# EAGLE board PANEL (EAGLE 7.2.0)
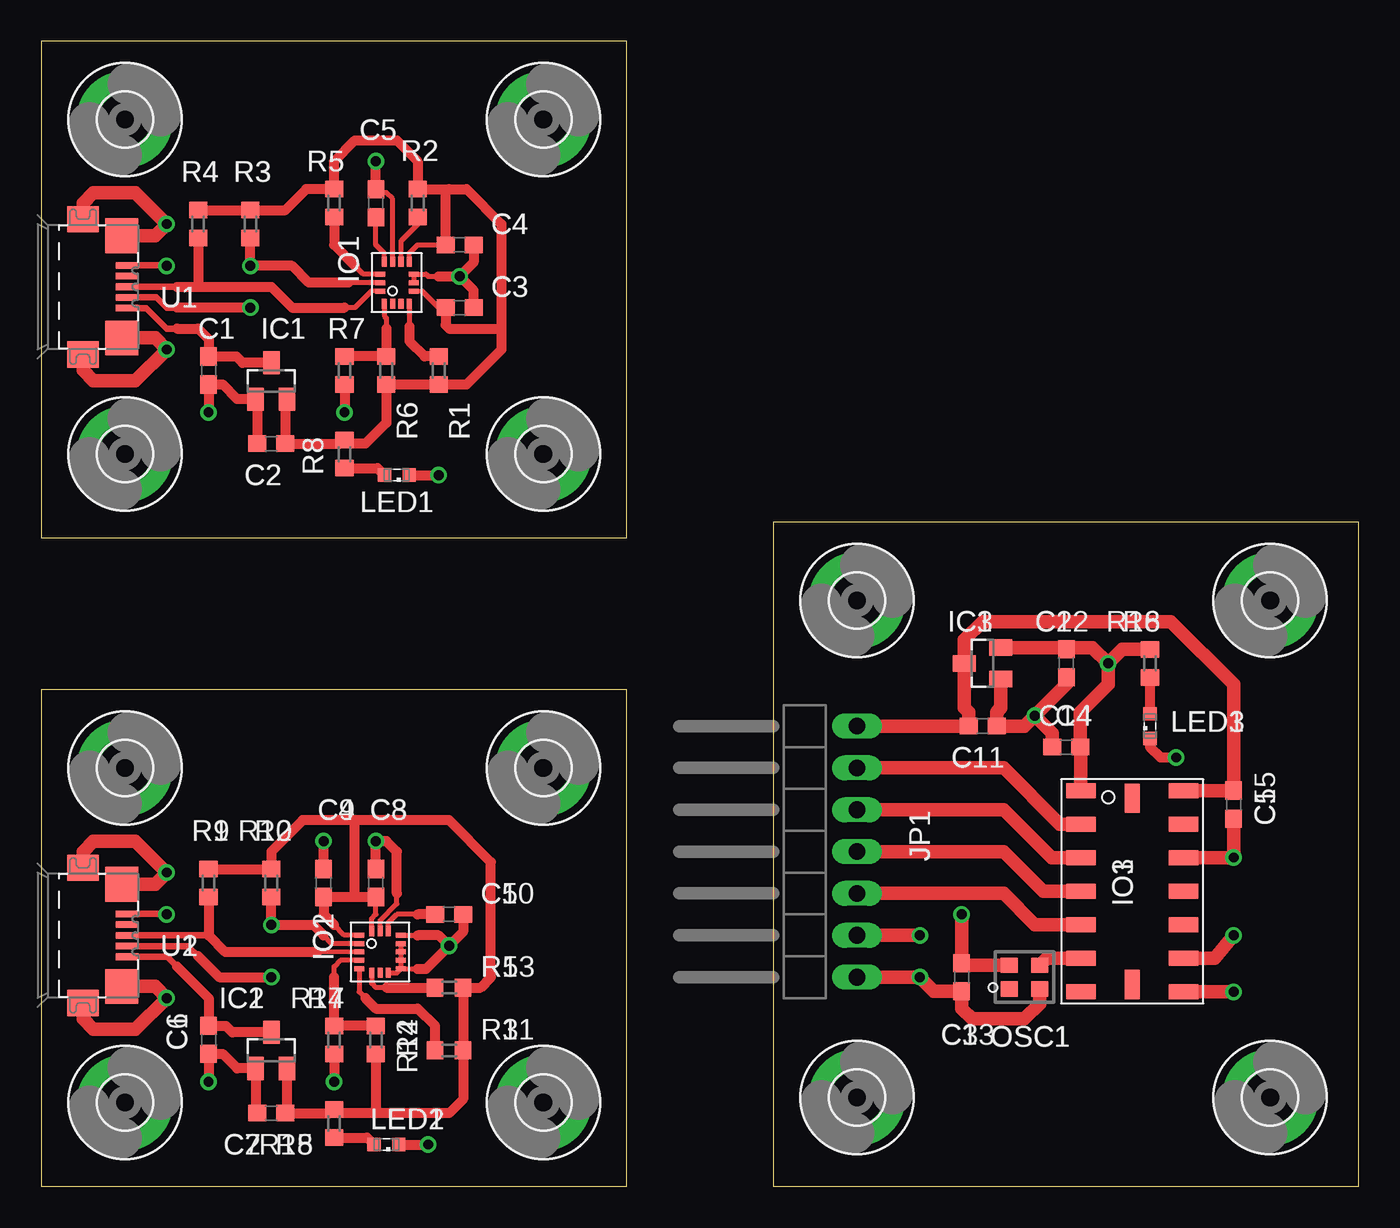
[diagram p0: board, top side]
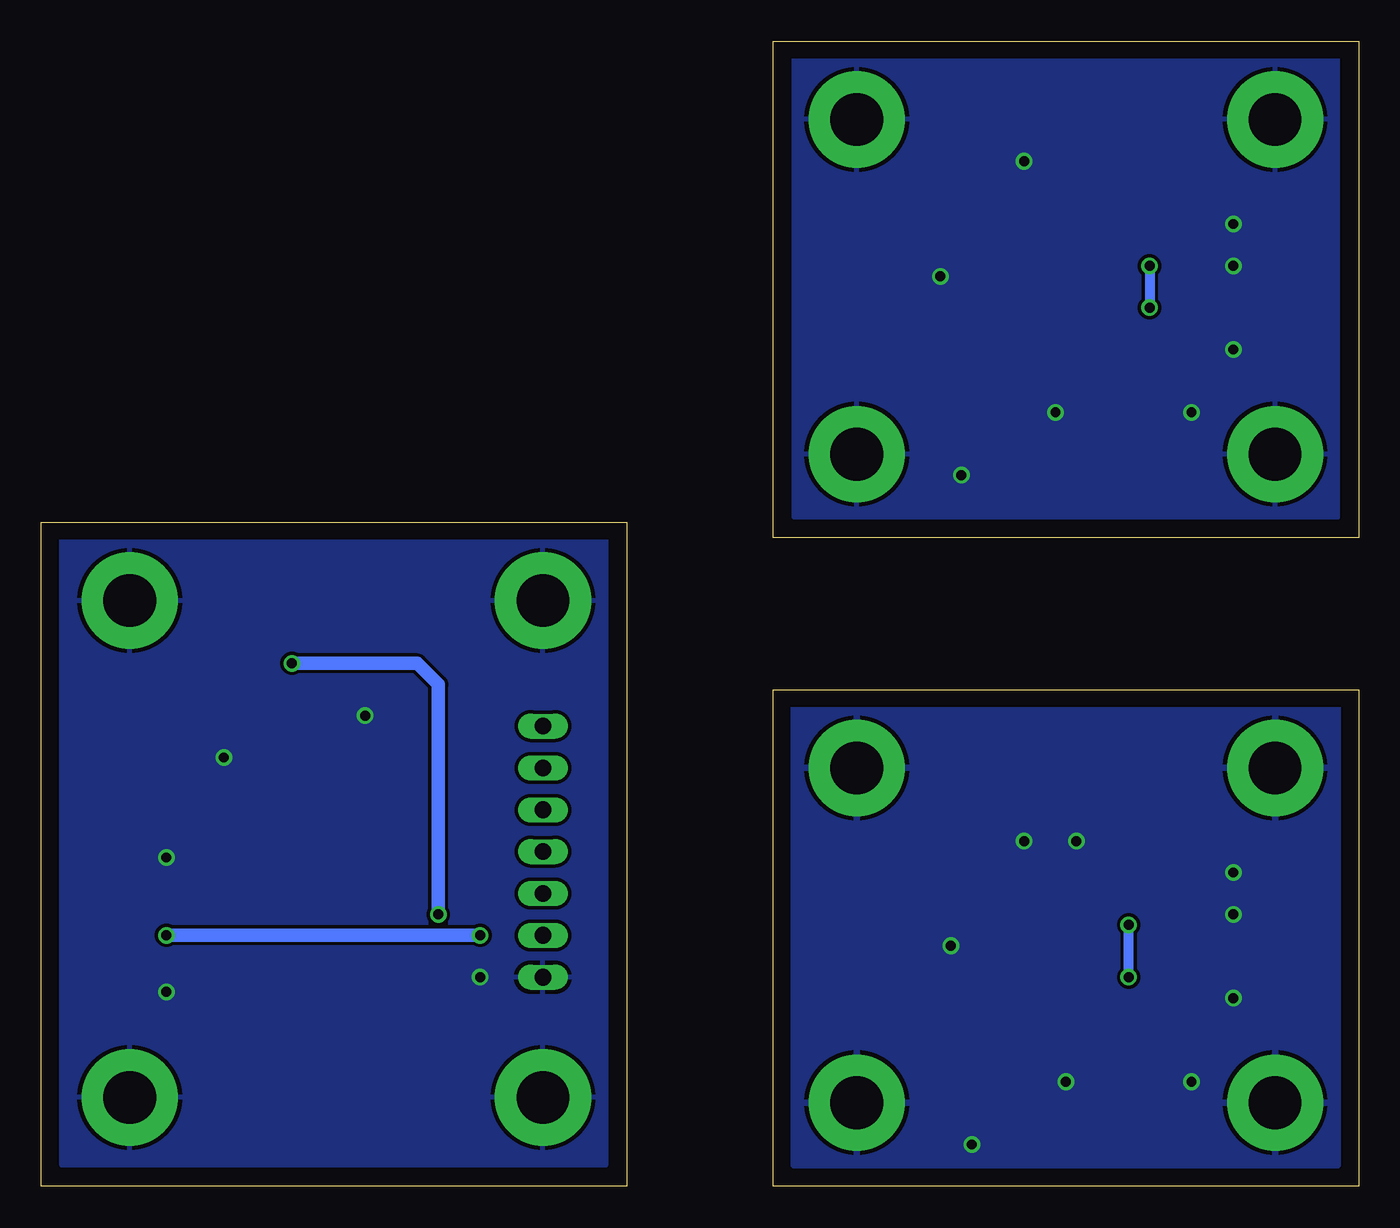
[diagram p1: board, bottom side, seen from below]

Size 79.99 x 69.52 mm. Coordinates in mm from the lower left corner, seen from the top.
Outline: 0,39.37 35.54,39.37 35.54,69.52 0,69.52 0,39.37
Outline: 0,0 35.54,0 35.54,30.15 0,30.15 0,0
Outline: 44.45,0 79.99,0 79.99,40.31 44.45,40.31 44.45,0
Copper layers (1*16): Top 0.035mm / dielectric 1.5mm / Bottom 0.035mm
Design rules "default": minimum track width 10mil, minimum drill 24mil, track to track 8mil, track to pad 8mil, pad to pad 8mil, via to via 8mil, smd to smd 8mil, copper to edge 40mil, drill to drill 8mil, minimum pad ring 10mil, minimum via ring 8mil, stop-mask expansion 4mil, vias tented up to drill 0mil, thermal gap 10mil

## Footprints (pad centres in the part's own frame; a part is rotated, then mirrored left to right if it is on the bottom)
C0603 = smd 1.1 x 1: 1 -0.85,0; 2 0.85,0
3,2-PAD = drill 3.2 pad 5.842: B3,2 0,0
SOT23 = smd 1 x 1.4: 1 -0.95,-1.1; 2 0.95,-1.1; 3 0,1.1
LGA14 = smd 0.61 x 0.305: P1 -1.274,0.762; P2 -1.274,0.254; P3 -1.274,-0.254; P4 -1.274,-0.762; P8 1.266,-0.762; P9 1.266,-0.254; P10 1.266,0.254; P11 1.266,0.762 | smd 0.305 x 0.61: P5 -0.512,-1.016; P6 -0.004,-1.016; P7 0.504,-1.016; P12 0.504,1.016; P13 -0.004,1.016; P14 -0.512,1.016
LGA16 = smd 0.61 x 0.305: P1 -1.274,1.012; P2 -1.274,0.504; P3 -1.274,-0.004; P4 -1.274,-0.512; P5 -1.274,-1.02; P9 1.266,-1.02; P10 1.266,-0.512; P11 1.266,-0.004; P12 1.266,0.504; P13 1.266,1.012 | smd 0.305 x 0.61: P6 -0.512,-1.274; P7 -0.004,-1.274; P8 0.504,-1.274; P14 0.504,1.266; P15 -0.004,1.266; P16 -0.512,1.266
LGA_MOD1600 = smd 1.778 x 0.914: P1 -2.921,6.223; P2 -2.921,4.191; P3 -2.921,2.159; P4 -2.921,0.127; P5 -2.921,-1.905; P6 -2.921,-3.937; P7 -2.921,-5.969; P9 3.302,-5.969; P10 3.302,-3.937; P11 3.302,-1.905; P12 3.302,0.127; P13 3.302,2.159; P14 3.302,4.191; P15 3.302,6.223 | smd 0.914 x 1.778: P8 0.191,-5.524; P16 0.191,5.779
1X07/90 = drill 1.016 long: 1 -7.62,-3.81; 2 -5.08,-3.81; 3 -2.54,-3.81; 4 0,-3.81; 5 2.54,-3.81; 6 5.08,-3.81; 7 7.62,-3.81
SML0603 = smd 0.8 x 0.8: A 0.75,0; C -0.75,0
SMD_OSC = smd 1.016 x 0.925: 1 -0.925,-0.724; 2 0.925,-0.724; 3 0.925,0.724; 4 -0.925,0.724
R0603 = smd 1 x 1.1: 1 -0.85,0; 2 0.85,0
ZX62R-B-5P = smd 1.35 x 0.4: 1 2.675,-1.3; 2 2.675,-0.65; 3 2.675,0; 4 2.675,0.65; 5 2.675,1.3 | smd 1.9 x 1.6: M1 0,-4.1; M2 0,4.1 | smd 2 x 2.1: M3 2.35,3.1; M4 2.35,-3.1

## Placement (x,y rotation side)
C1  2u2  [C0603]  10.16,49.53 270 top
C2  2u2  [C0603]  13.97,45.09 180 top
C3  100n  [C0603]  25.4,53.34 0 top
C4  100n  [C0603]  25.4,57.15 0 top
C5  100n  [C0603]  20.32,59.69 90 top
C6  2u2  [C0603]  10.16,8.89 270 top
C7  2u2  [C0603]  13.97,4.45 180 top
C8  100n  [C0603]  20.32,18.41 90 top
C9  100n  [C0603]  17.14,18.41 90 top
C10  100n  [C0603]  24.77,16.51 0 top
C11  2u2  [C0603]  57.15,27.94 0 top
C12  2u2  [C0603]  62.23,31.75 270 top
C13  100n  [C0603]  55.88,12.7 270 top
C14  100n  [C0603]  62.23,26.67 180 top
C15  100n  [C0603]  72.39,23.18 270 top
H1  MOUNT-PAD-ROUND3.2  [3,2-PAD]  30.48,64.77 0 top
H2  MOUNT-PAD-ROUND3.2  [3,2-PAD]  30.48,44.45 0 top
H3  MOUNT-PAD-ROUND3.2  [3,2-PAD]  5.08,44.45 0 top
H4  MOUNT-PAD-ROUND3.2  [3,2-PAD]  5.08,64.77 0 top
H5  MOUNT-PAD-ROUND3.2  [3,2-PAD]  5.08,25.4 0 top
H6  MOUNT-PAD-ROUND3.2  [3,2-PAD]  30.48,25.4 0 top
H7  MOUNT-PAD-ROUND3.2  [3,2-PAD]  30.48,5.08 0 top
H8  MOUNT-PAD-ROUND3.2  [3,2-PAD]  5.08,5.08 0 top
H9  MOUNT-PAD-ROUND3.2  [3,2-PAD]  74.61,35.56 0 top
H10  MOUNT-PAD-ROUND3.2  [3,2-PAD]  74.61,5.4 0 top
H11  MOUNT-PAD-ROUND3.2  [3,2-PAD]  49.53,5.4 0 top
H12  MOUNT-PAD-ROUND3.2  [3,2-PAD]  49.53,35.56 0 top
IC1  MCP1703CB  [SOT23]  13.97,48.9 0 top
IC2  MCP1703CB  [SOT23]  13.97,8.26 0 top
IC3  MCP1703CB  [SOT23]  57.15,31.75 90 top
IO1  [LGA14]  21.59,54.86 90 top
IO2  [LGA16]  20.57,14.24 0 top
IO3  [LGA_MOD1600]  66.04,17.78 0 top
JP1  [1X07/90]  45.72,20.32 90 top
LED1  [SML0603]  21.59,43.18 180 top
LED2  [SML0603]  20.95,2.54 180 top
LED3  [SML0603]  67.31,27.94 90 top
OSC1  KC2520B32K7680CM2E00  [SMD_OSC]  59.69,12.7 0 top
R1  10k  [R0603]  24.13,49.53 270 top
R2  10k  [R0603]  22.86,59.69 90 top
R3  10k  [R0603]  12.7,58.42 90 top
R4  10k  [R0603]  9.53,58.42 90 top
R5  10k  [R0603]  17.78,59.69 90 top
R6  10k  [R0603]  20.95,49.53 270 top
R7  0R  [R0603]  18.41,49.53 90 top
R8  220R  [R0603]  18.41,44.45 90 top
R9  10k  [R0603]  10.16,18.41 90 top
R10  10k  [R0603]  13.97,18.41 90 top
R11  10k  [R0603]  24.77,8.26 0 top
R12  10k  [R0603]  20.32,8.89 270 top
R13  10k  [R0603]  24.77,12.06 0 top
R14  0R  [R0603]  17.78,8.89 90 top
R15  220R  [R0603]  17.78,3.81 90 top
R16  220R  [R0603]  67.31,31.75 90 top
U1  MICRO-USB-SHIELD-ZX62R-B-5P  [ZX62R-B-5P]  2.54,54.61 0 top
U2  MICRO-USB  [ZX62R-B-5P]  2.54,15.24 0 top

## Library data of the parts
C1-C15 R1-R16 = rcl
H1-H12 = holes
IC1-IC3 = linear
IO1-IO3 OSC1 = gyro
JP1 = pinhead
LED1-LED3 = led
U1 U2 = con-hirose

## Nets
+3V1: C7.1 C8.1 C9.1 IC2.2 IO2.P1 IO2.P16 R9.2 R10.2 R11.2 R12.2 R13.2 R15.2
+3V2: C12.1 C13.1 C14.1 IC3.2 IO3.P1 OSC1.4 R16.2
+3V3: C2.1 C3.1 C4.1 IC1.2 IO1.P5 IO1.P8 R1.2 R2.2 R3.2 R4.2 R5.2 R6.2 R8.2
+5V: C1.1 IC1.3 U1.1
+5V1: C6.1 IC2.3 U2.1
+5V2: C11.1 C15.1 IC3.3 IO3.P15 JP1.7
CLKIN: IO3.P6 OSC1.3
DRDY: IO3.P10 JP1.2
GND: C1.2 C2.2 C3.2 C4.2 C5.2 H1.B3,2 H2.B3,2 H3.B3,2 H4.B3,2 IC1.1 IO1.P6 IO1.P7 IO1.P10 LED1.C R7.1 U1.5 U1.M1 U1.M2 U1.M3 U1.M4
GND1: C6.2 C7.2 C8.2 C9.2 C10.2 H5.B3,2 H6.B3,2 H7.B3,2 H8.B3,2 IC2.1 IO2.P8 IO2.P9 IO2.P10 IO2.P11 IO2.P12 IO2.P13 IO2.P15 LED2.C R14.1 U2.5 U2.M1 U2.M2 U2.M3 U2.M4
GND2: C11.2 C12.2 C13.2 C14.2 C15.2 H9.B3,2 H10.B3,2 H11.B3,2 H12.B3,2 IC3.1 IO3.P9 IO3.P13 JP1.1 LED3.C OSC1.2
N$1: IO1.P9 R2.1
N$2: IO1.P4 R1.1
N$3: C5.1 IO1.P11
N$4: IO1.P13 R3.1 U1.2
N$5: IO1.P14 R4.1 U1.3
N$6: LED2.A R15.1
N$7: IO1.P12 R5.1
N$8: IO1.P1 R6.1 R7.2
N$9: LED1.A R8.1
N$10: C10.1 IO2.P14
N$11: IO2.P2 R10.1 U2.2
N$12: IO2.P3 R9.1 U2.3
N$13: IO2.P5 R11.1
N$14: IO2.P4 R12.1 R14.2
N$15: IO2.P6 R13.1
N$16: LED3.A R16.1
NCS: IO3.P2 JP1.6
SCLK: IO3.P5 JP1.3
SDI: IO3.P4 JP1.4
SDO: IO3.P3 JP1.5

## Tracks (layer width: path | path; a pad name or v marks a point on that pad's centre or on a via)
+3V1
  Top 0.305: IO2.P16 20.07,16.26 20.32,16.51 C8.1 | IO2.P1 18.41,15.25 17.78,15.88
  Top 0.61: 19.05,22.23 24.77,22.23 27.3,19.68 27.3,12.7 26.67,12.06 R13.2 R11.2 25.61,5.29 24.77,4.45 20.32,4.45 | 19.05,22.23 15.88,22.23 13.97,20.32 R10.2 R9.2 | 19.05,17.57 19.05,22.23 | C8.1 19.05,17.57 | 19.05,17.57 C9.1 17.14,16.51 17.78,15.88 | R12.2 20.32,4.45 | IC2.2 14.92,4.54 C7.1 17.57,4.45 R15.2 18,4.45 20.32,4.45
+3V2  (via drill 0.6)
  Top 0.813: v55.88,16.51 C13.1 56.09,13.55 55.97,13.42 OSC1.4 | IO3.P1 63.12,26.63 C14.1 63.08,28.79 64.77,30.48 v64.77,31.75 | R16.2 65.62,32.6 v64.77,31.75 | 62.13,32.7 63.82,32.7 v64.77,31.75 | IC3.2 62.13,32.7 | 62.13,32.7 C12.1
  Bottom 0.813: v55.88,16.51 55.88,30.48 57.15,31.75 v64.77,31.75
+3V3
  Top 0.305: IO1.P5 23.11,54.36 24.13,53.34 C3.1 | IO1.P8 22.35,56.64 22.86,57.15 C4.1
  Top 0.61: R4.2 R3.2 14.82,59.27 16.09,60.54 R5.2 17.78,62.23 19.05,63.5 21.59,63.5 22.86,62.23 R2.2 24.77,60.54 | IC1.2 14.82,47.8 C2.1 18.2,45.09 R8.2 18.63,45.09 19.68,45.09 20.95,46.35 R6.2 R1.2 25.82,48.68 27.94,50.8 27.94,52.07 | 24.77,60.54 25.82,60.54 27.94,58.42 27.94,52.07 | C3.1 24.55,52.28 24.77,52.07 27.94,52.07 | C4.1 24.55,60.33 24.77,60.54
+5V
  Top 0.406: U1.1 6.38,53.31 7.62,52.07 8.26,52.07
  Top 0.61: IC1.3 12.23,49.99 11.85,50.38 C1.1 10.16,51.44 9.53,52.07 8.26,52.07
+5V1
  Top 0.406: U2.1 7.65,13.94 8.26,13.34
  Top 0.61: IC2.3 11.6,9.36 11.21,9.74 C6.1 10.16,11.43 8.26,13.34
+5V2
  Top 0.813: JP1.7 C11.1 56.3,28.79 56.05,29.04 IC3.3 56.05,33.19 57.15,34.29 68.58,34.29 72.39,30.48 C15.1 72.36,24 IO3.P15
CLKIN
  Top 0.813: IO3.P6 61.03,13.84 OSC1.3
DRDY  (via drill 0.6)
  Top 0.813: JP1.2 v53.34,15.24 | IO3.P10 71.25,13.84 v72.39,15.24
  Bottom 0.813: v53.34,15.24 v72.39,15.24
GND  (via drill 0.6)
  Top 0.305: IO1.P10 21.34,59.94 20.95,60.33 20.54,60.33 C5.2 | IO1.P6 IO1.P7 23.37,55.37 23.5,55.24 24.13,55.24 | 25.27,55.37 v25.4,55.24
  Top 0.406: U1.5 7.62,55.91 v7.62,55.88
  Top 0.61: LED1.C v24.13,43.18 | C5.2 v20.32,62.23 | C2.2 13.12,47.8 IC1.1 11.89,47.8 11.01,48.68 C1.2 v10.16,46.99 | C4.2 26.25,56.09 v25.4,55.24 | C3.2 26.25,54.4 v25.4,55.24 | R7.1 v18.41,46.99 | 24.13,55.24 v25.4,55.24
  Top 0.813: U1.M3 6.91,57.71 v7.62,58.42 5.71,60.33 3.17,60.33 2.54,59.69 U1.M2 | U1.M4 6.91,51.51 v7.62,50.8 5.71,48.9 3.17,48.9 2.54,49.53 U1.M1
  pour Bottom: 1.27,40.64 1.27,68.58 34.29,68.58 34.29,40.64
GND1  (via drill 0.6)
  Top 0.305: 21.59,17.78 21.59,17.14 20.57,16.12 IO2.P15 | IO2.P8 21.59,12.95 IO2.P9 | IO2.P9 IO2.P10 IO2.P11 IO2.P12 | IO2.P9 22.85,13.22 22.86,13.21 | IO2.P13 22.85,15.25 22.86,15.24
  Top 0.406: U2.5 7.59,16.54 v7.62,16.51
  Top 0.61: C7.2 13.02,4.54 IC2.1 11.89,7.16 11.01,8.04 C6.2 v10.16,6.35 | R14.1 v17.78,6.35 | LED2.C v23.5,2.54 | C9.2 v17.14,20.95 | C8.2 v20.32,20.95 20.95,20.95 21.59,20.32 21.59,17.78 | C10.2 25.61,15.46 v24.77,14.61 | v24.77,14.61 24.13,15.24 22.86,15.24 | v24.77,14.61 23.37,13.21 22.86,13.21
  Top 0.813: U2.M3 6.91,18.34 v7.62,19.05 5.71,20.95 3.17,20.95 2.54,20.32 U2.M2 | U2.M1 2.54,10.16 3.17,9.53 5.71,9.53 v7.62,11.43 6.91,12.14 U2.M4
  pour Bottom: 1.27,29.21 1.27,1.27 34.29,1.27 34.29,29.21
GND2  (via drill 0.6)
  Top 0.61: LED3.C 67.31,26.67 67.94,26.04 v68.9,26.04
  Top 0.813: OSC1.2 60.62,11.09 59.69,10.16 56.52,10.16 55.88,10.79 C13.2 54.19,11.85 v53.34,12.7 JP1.1 | C15.2 v72.39,19.96 72.36,19.94 IO3.P13 | v60.33,28.57 59.69,27.94 C11.2 58,28.79 58.25,29.04 IC3.1 | C12.2 62.23,30.48 v60.33,28.57 | C14.2 61.38,27.52 v60.33,28.57 | IO3.P9 v72.39,11.81
  pour Bottom: 45.72,39.37 45.72,1.27 78.74,1.27 78.74,39.37
N$1
  Top 0.305: IO1.P9 21.84,57.4 22.86,58.42 R2.1
N$2
  Top 0.305: IO1.P4 22.35,52.2
  Top 0.61: 22.35,52.2 22.35,51.31 23.28,50.38 R1.1
N$3
  Top 0.305: IO1.P11 20.83,56.64 20.32,57.15 C5.1
N$4  (via drill 0.6)
  Top 0.305: IO1.P13 18.67,54.86
  Top 0.406: 8.26,53.34 7.62,53.34 7,53.96 U1.2
  Top 0.61: 18.67,54.86 16.26,54.86 15.24,55.88 v12.7,55.88 R3.1 | v12.7,53.34 8.26,53.34
  Bottom 0.61: v12.7,55.88 v12.7,53.34
N$5
  Top 0.305: IO1.P14 20.07,54.36 19.05,53.34 18.41,53.34
  Top 0.406: U1.3 8.26,54.61
  Top 0.61: 8.26,54.61 9.53,54.61 | 9.53,54.61 13.97,54.61 15.24,53.34 18.41,53.34 | R4.1 9.53,54.61
N$6
  Top 0.61: R15.1 19.79,2.96 LED2.A
N$7
  Top 0.305: IO1.P12 19.56,55.37 19.05,55.88
  Top 0.61: R5.1 17.78,57.15 19.05,55.88
N$8
  Top 0.305: IO1.P1 20.83,52.83 20.95,52.7 20.95,52.07
  Top 0.61: 20.95,52.07 R6.1 R7.2
N$9
  Top 0.61: R8.1 20.42,43.6 LED1.A
N$10
  Top 0.305: IO2.P14 21.08,16 21.59,16.51 22.86,16.51
  Top 0.61: C10.1 22.86,16.51
N$11  (via drill 0.6)
  Top 0.305: IO2.P2 17.64,14.74 17.14,15.24
  Top 0.406: U2.2 8.9,14.59 9.53,13.97
  Top 0.61: R10.1 v13.97,15.88 16.51,15.88 17.14,15.24 | v13.97,12.7 10.79,12.7 9.53,13.97
  Bottom 0.61: v13.97,12.7 v13.97,15.88
N$12
  Top 0.305: IO2.P3 16.76,14.22
  Top 0.406: U2.3 10.16,15.24
  Top 0.61: 16.76,14.22 11.18,14.22 10.16,15.24 R9.1
N$13
  Top 0.305: IO2.P5 19.3,11.81 19.68,11.43
  Top 0.61: 19.68,11.43 20.32,10.79 22.86,10.79 23.91,9.74 R11.1
N$14
  Top 0.305: IO2.P4 18.16,13.72 17.78,13.34 17.78,12.7
  Top 0.61: R12.1 R14.2 17.78,12.7
N$15
  Top 0.305: 20.95,12.06 20.32,12.06 20.07,12.32 IO2.P6
  Top 0.61: 20.95,12.06 R13.1
N$16
  Top 0.61: R16.1 LED3.A
NCS
  Top 0.813: IO3.P2 61.85,21.97 58.42,25.4 JP1.6
SCLK
  Top 0.813: IO3.P5 60.33,15.88 58.42,17.78 JP1.3
SDI
  Top 0.813: IO3.P4 60.83,17.91 58.42,20.32 JP1.4
SDO
  Top 0.813: IO3.P3 61.34,19.94 58.42,22.86 JP1.5

## Text on the board
_tNames: C5 | R2 | R5 | R4 | R3 | C4 | U1 | IO1 | C3 | R7 | C1 | IC1 | R6 | R1 | C2 | R8 | LED1 | IC1 | R8 | C2 | C4 | LED1 | C1 | C4 | C3 | JP1 | R1 | R2 | C5 | C5 | IO1 | U1 | IO1 | R5 | R7 | IC1 | R4 | R3 | C3 | C1 | OSC1 | LED1 | C2 | R8